# Altium PCB PCB.PcbDoc
Units mm, origin at the board's own origin, x right, y up, seen from the top; angles counter-clockwise.
Board outline 50 x 100 mm, 2 copper layers (Top Layer, Bottom Layer); 42 components, 35 nets, 172 pads, 0 vias.
Unrouted connection lines stored in the file: 92.
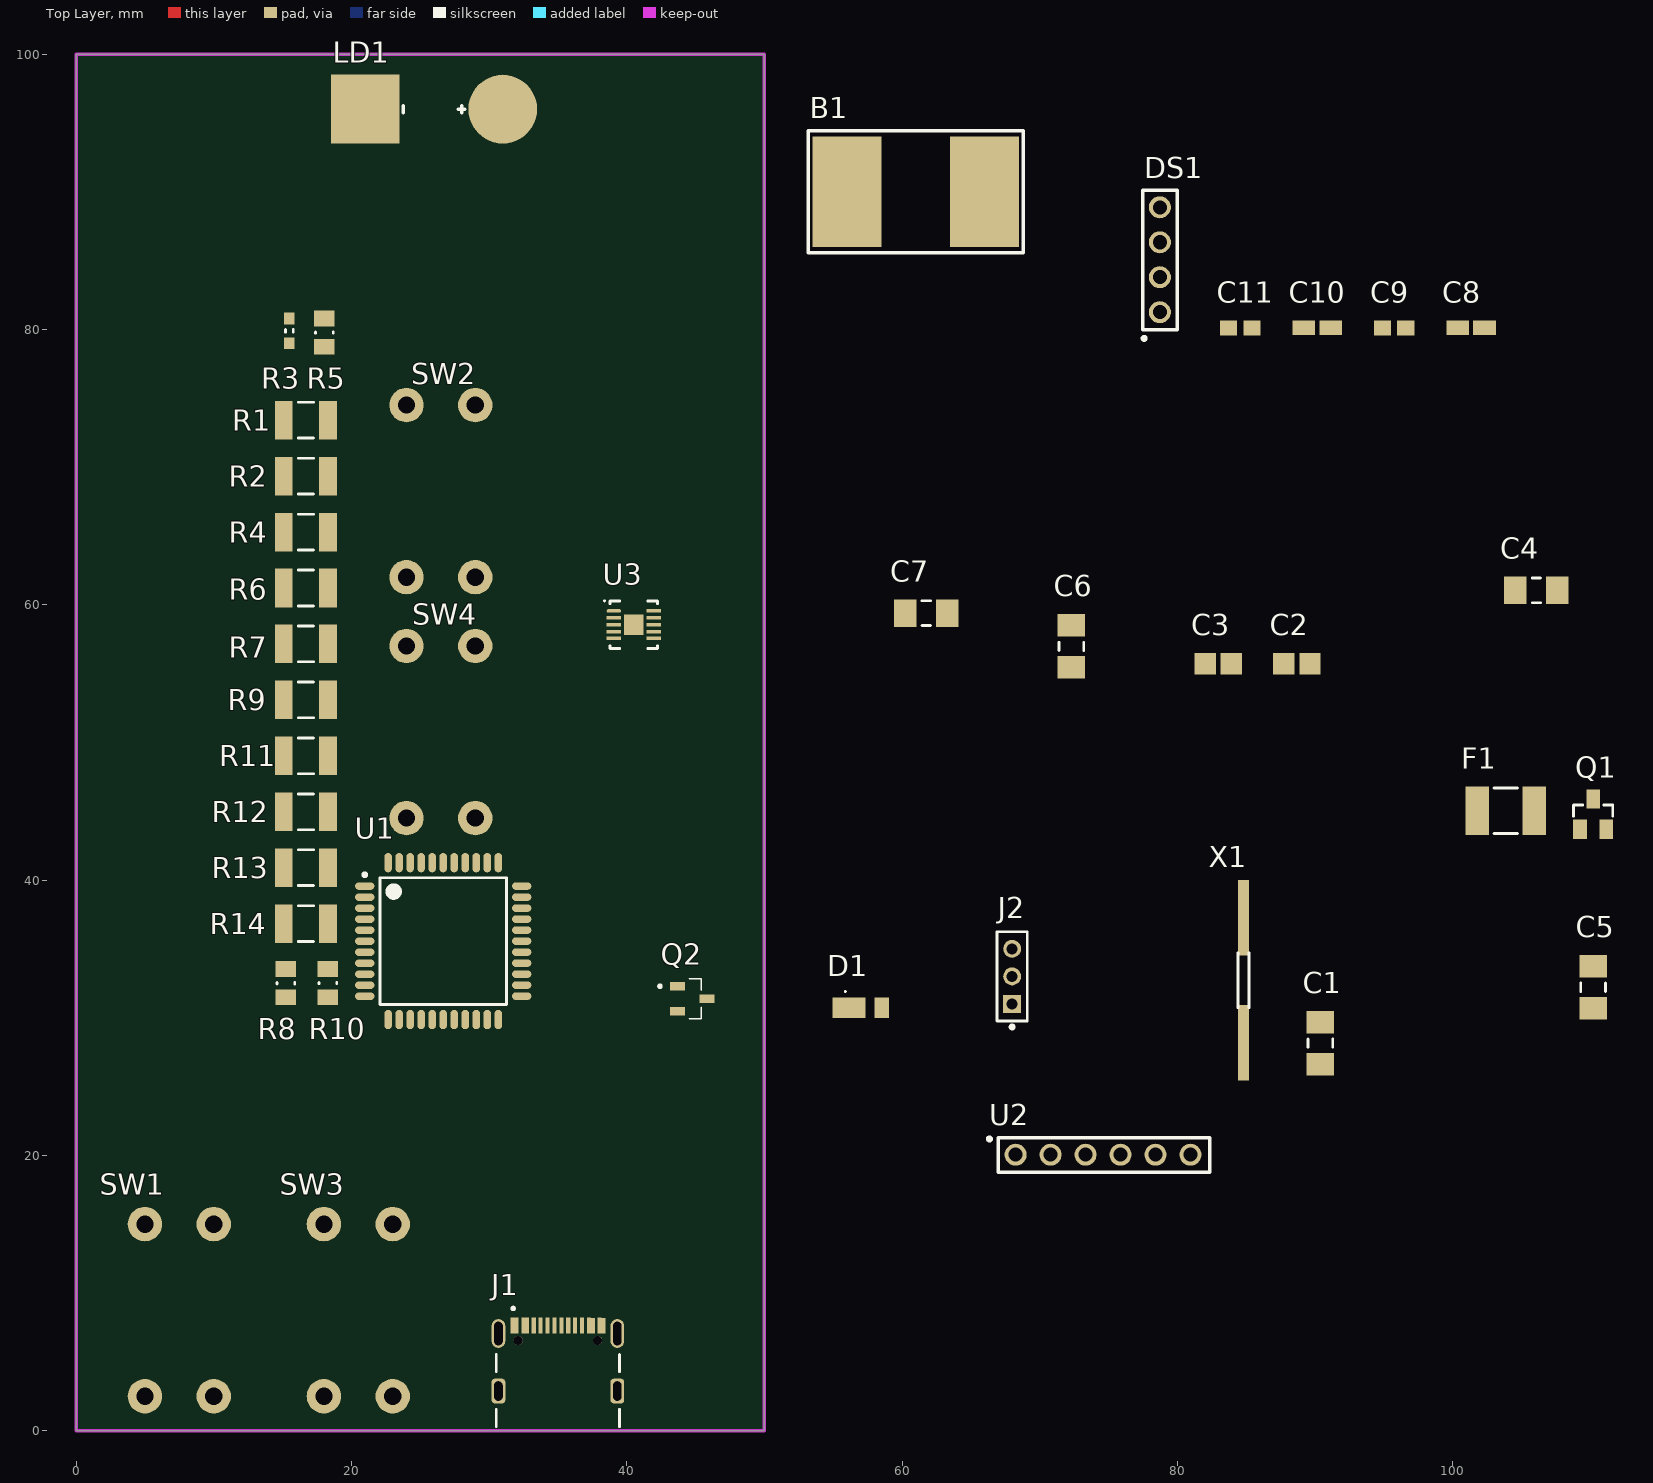
[diagram p0: Top Layer view]
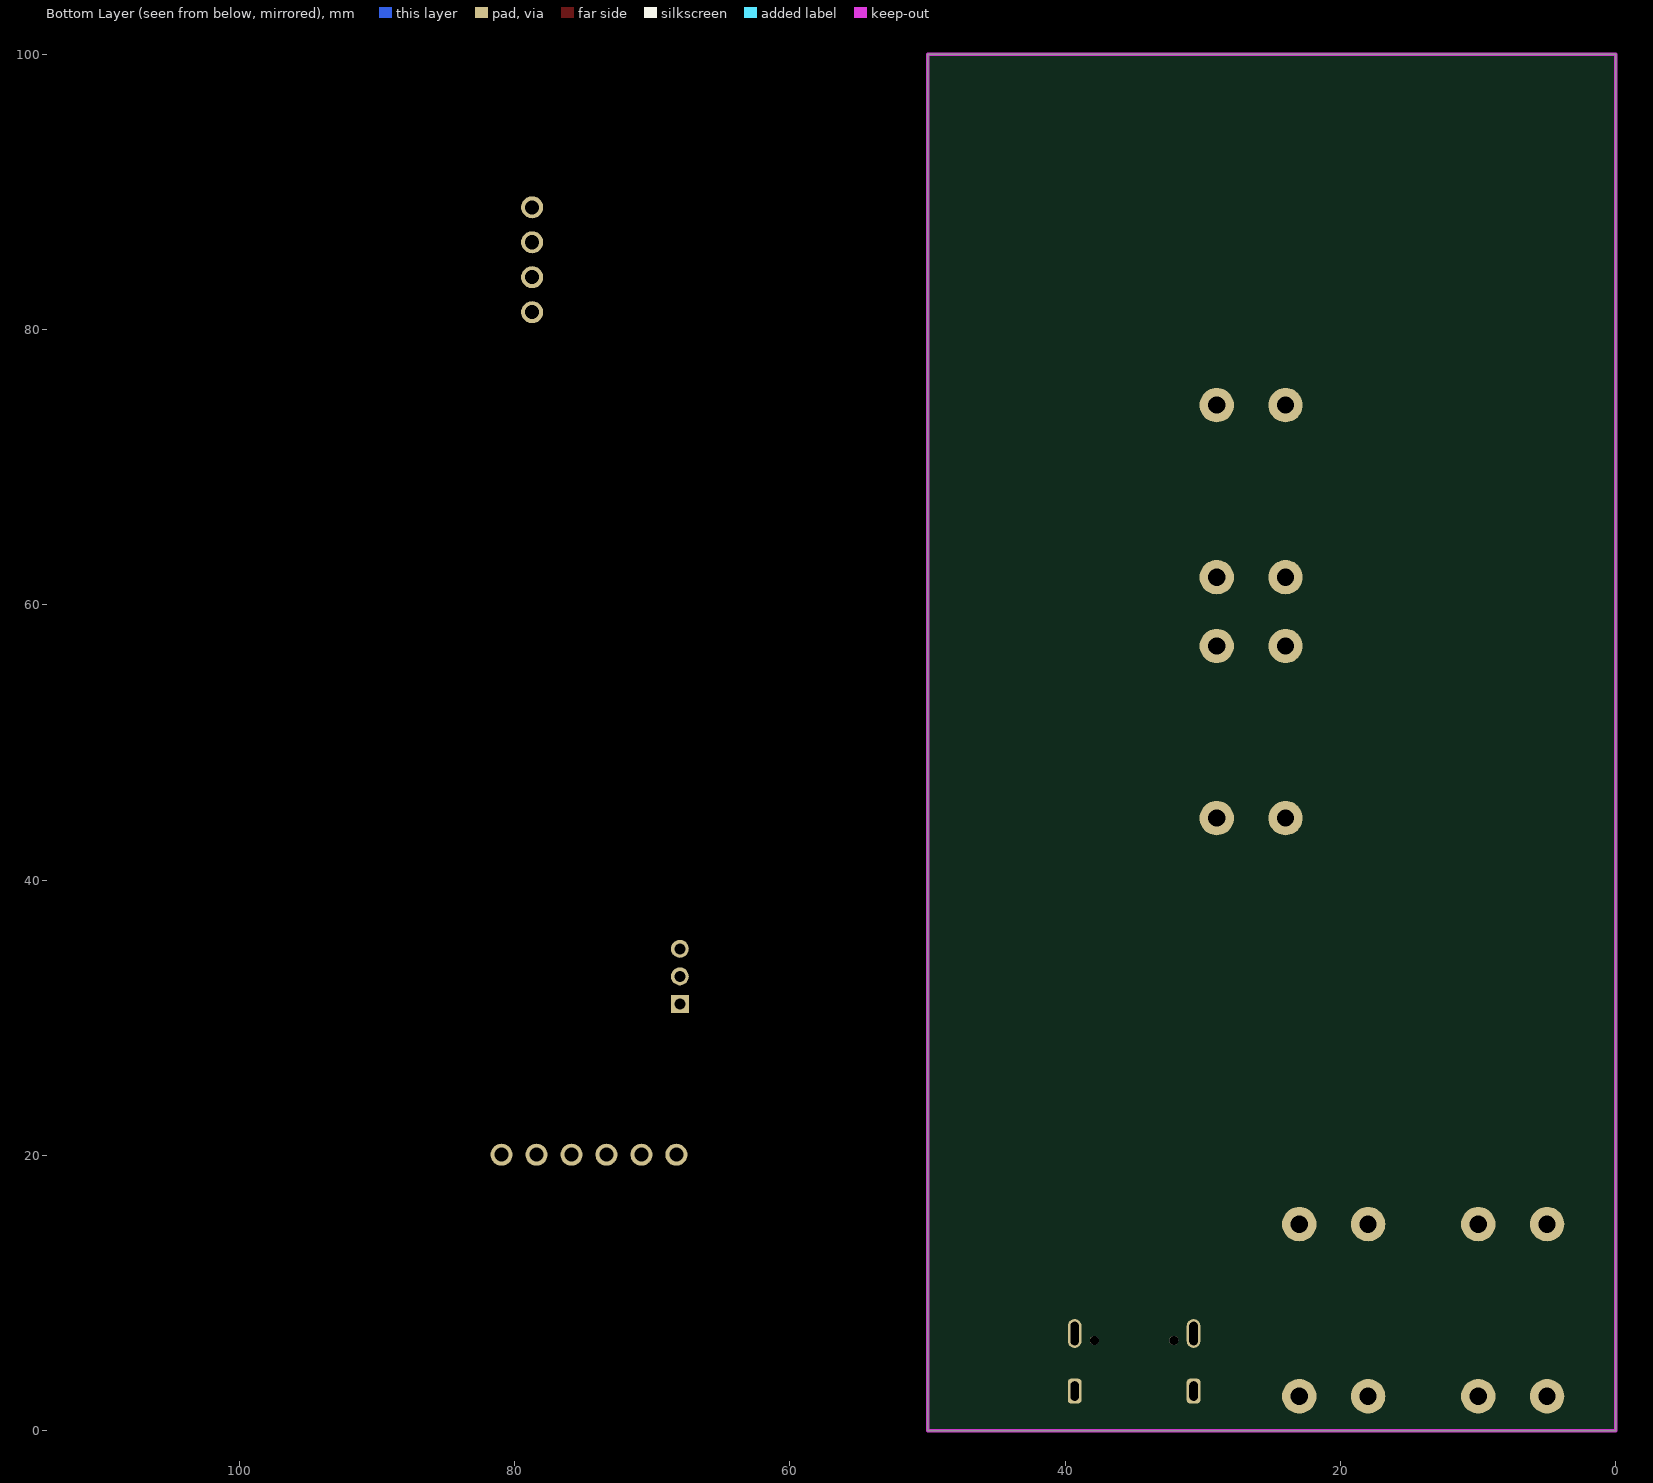
[diagram p1: Bottom Layer view, seen from below]

## Layer stack, top to bottom
Top Solder: solder mask 0.0102, Solder Resist, Dk 3.5
Top Layer: signal copper 0.0356
Dielectric 1: dielectric 0.32, FR-4, Dk 4.8
Bottom Layer: signal copper 0.0356
Bottom Solder: solder mask 0.0102, Solder Resist, Dk 3.5

## Board outline
0,0 0,100 50,100 50,0

## Design rules (kind name [scope] priority, off if disabled: settings)
Clearance [All] p1: gap=0.254 ignorepadtopadclearanceinfootprint=FALSE
PolygonConnect [All] p1: connectstyle=Relief reliefconductorwidth=0.254 reliefentries=4 polygonreliefangle="90 Angle" airgapwidth=0.254
RoutingVias [All] p1: holewidth=0.711 width=1.27 viastyle="Through Hole" minholewidth=0.711 minwidth=1.27 maxholewidth=0.711 maxwidth=1.27
SolderMaskExpansion [All] p1: expansion=0.102 istentingtop=FALSE
SupplyNets "Schematic Supply Nets_2" [InNet('VBATT')] p1: voltage=0.000
SupplyNets "Schematic Supply Nets_1" [InNet('+3V3')] p2: voltage=0.000
SupplyNets "Schematic Supply Nets" [InNet('GND')] p3: voltage=0.000
Width [All] p1: maxlimit=0.254 minlimit=0.254 preferedwidth=0.254
30 further rules are at their usual default settings.

## Classes and differential pairs
component class randcomponenten: B1 C8 C9 C10 C11 D1 DS1 F1 J1 J2 LD1 Q1 Q2 R1 R3 R4 R5 R6 R7 R8 R9 R10 R11 R12 R13 R14 SW1 SW2 SW3 SW4 U2 U3
component class chip: C1 C2 C3 C4 C5 C6 C7 U1 X1

## Components (designator, comment, footprint, x,y, rotation, side; value= is the part's Value field where it differs from the comment)
B1 "2xAA" BATTERIJHOUDER 66,90 r90 top
C1 "0.1µF" CAPC1210X70M 90.399,28.147 r90 top
C2 "12pF" CAPC1210X14M 88.685,55.706 r0 top
C3 "12pF" CAPC1210X14M 82.97,55.706 r0 top
C4 "0.1µF" CAPC1210X70M 106.083,61.04 r0 top
C5 "0.1µF" CAPC1210X70M 110.211,32.21 r270 top
C6 "0.1µF" CAPC1210X70M 72.302,56.977 r90 top
C7 "0.1µF" CAPC1210X70M 61.76,59.389 r0 top
C8 "1µF" CAPC0603X8M 101.338,80.107 r0 top
C9 "10µF" CAPC0603X035M 95.75,80.107 r0 top
C10 "1µF" CAPC0603X8M 90.162,80.107 r0 top
C11 "10µF" CAPC0603X035M 84.574,80.107 r0 top
D1 "DFLS120LQ-7" SDIODSMA1810X1M 57.332,30.714 r0 top
DS1 "LCD" LCD3V3 78.732,85.06 r90 top
F1 "MINIASMDC075F/33-2" RESC4632X15M 103.861,45.038 r0 top
J1 "USBConnector" PCBComponent_1 35,5.252 r0 top
J2 "NRPN031PAEN-RC" FP-NRPN031PAEN-RC-MFG 68,33 r90 top
LD1 "Laser" laser 26,96 r90 top
Q1 "FDN304P" FDN304P 110.211,44.784 r0 top
Q2 "DMN2056U7" DMN2056U-7 44.756,31.37 r0 top
R1 "10kOhm" R1210X06M 16.688,73.406 r0 top
R2 "10k" R1210X06M 16.688,69.342 r0 top
R3 "100kOhm" R0603X045M 15.494,79.894 r90 top
R4 "10kOhm" R1210X06M 16.688,65.278 r0 top
R5 "22Ohm" R0805X045M 18.034,79.765 r270 top
R6 "10kOhm" R1210X06M 16.688,61.214 r0 top
R7 "10kOhm" R1210X06M 16.688,57.15 r0 top
R8 "22Ohm" R0805X045M 15.24,32.503 r270 top
R9 "10kOhm" R1210X06M 16.688,53.086 r0 top
R10 "22Ohm" R0805X045M 18.288,32.512 r270 top
R11 "10kOhm" R1210X06M 16.688,49.022 r0 top
R12 "10kOhm" R1210X06M 16.688,44.958 r0 top
R13 "10kOhm" R1210X06M 16.688,40.894 r0 top
R14 "10kOhm" R1210X06M 16.688,36.83 r0 top
SW1 "Button" BUTTON 1.612,15.594 r270 top
SW2 "Button" BUTTON 32.388,61.406 r90 top
SW3 "Button" BUTTON 26.388,1.906 r90 top
SW4 "Button" BUTTON 32.388,43.906 r90 top
U1 "ATmega32u4" Atmega32u4 26.67,35.56 r0 top
U2 "Sensor" Vl53l1x 74.604,20.046 r0 top
U3 "MCP1256T" MCP1256T 40.513,58.548 r0 top
X1 "XTAL_8MHz" Xtal_HC49SSDLF 84.811,32.719 r90 top

## Footprints (in the part's own frame and the unit in brackets; to place one, negate y for a bottom-side part, rotate by r counter-clockwise, add the part's x,y. Pads: shape width x height; smd on the part's side, far side on the other; paste and mask are expansions set on the pad)
Atmega32u4 [mm] "TQFP, 44-Leads, Body 10.00x10.00mm, Pitch 0.80mm, Thermal Pad 4.60x4.60mm, IPC Medium Density"
  oval 1.4x0.55 smd: 1(-5.7,4) 2(-5.7,3.2) 3(-5.7,2.4) 4(-5.7,1.6) 5(-5.7,0.8) 6(-5.7,0) 7(-5.7,-0.8) 8(-5.7,-1.6) 9(-5.7,-2.4) 10(-5.7,-3.2) 11(-5.7,-4) 23(5.7,-4) 24(5.7,-3.2) 25(5.7,-2.4) 26(5.7,-1.6) 27(5.7,-0.8) 28(5.7,0) 29(5.7,0.8) 30(5.7,1.6) 31(5.7,2.4) 32(5.7,3.2) 33(5.7,4)
  oval 0.55x1.4 smd: 12(-4,-5.7) 13(-3.2,-5.7) 14(-2.4,-5.7) 15(-1.6,-5.7) 16(-0.8,-5.7) 17(0,-5.7) 18(0.8,-5.7) 19(1.6,-5.7) 20(2.4,-5.7) 21(3.2,-5.7) 22(4,-5.7) 34(4,5.7) 35(3.2,5.7) 36(2.4,5.7) 37(1.6,5.7) 38(0.8,5.7) 39(0,5.7) 40(-0.8,5.7) 41(-1.6,5.7) 42(-2.4,5.7) 43(-3.2,5.7) 44(-4,5.7)
  silkscreen extent -5.82,-4.6 4.6,4.95, body extent -5,-5 5,5, height 1
BATTERIJHOUDER [mm]
  rect 8x5 smd: 1(0,0) 2(0,10)
  silkscreen extent -4.45,-2.79 4.44,12.83
BUTTON [mm]
  round 2.5 hole 1.25: 1(0.594,8.388) 2(13.094,8.388) 3(0.594,3.388) 4(13.094,3.388)
  body extent -0.14,-0.16 13.86,11.84, height 7.2
CAPC0603X8M [mm] "Chip Capacitor, 2-Leads, Body 4.50x3.10mm, IPC Low Density"
  rect 1.65x1.05 smd: 1(-0.975,0) 2(0.975,0)
  body extent -1.2,-0.4 1.2,0.4, height 0.8
CAPC0603X035M [mm] "Chip Capacitor, 2-Leads, Body 1.60x0.81mm, IPC Low Density"
  rect 1.25x1.1 smd: 1(-0.85,0) 2(0.85,0)
  body extent -0.87,-0.48 0.87,0.48, height 0.35
CAPC1210X14M [mm] "Chip Capacitor, 2-Leads, Body 2.10x1.25mm, IPC Low Density"
  rect 1.55x1.55 smd: 1(-0.95,0) 2(0.95,0)
  body extent -1.15,-0.72 1.15,0.72, height 1.15
CAPC1210X70M [mm] "Chip Resistor, 2-Leads, Body 3.30x1.70mm, IPC Low Density"
  rect 1.65x2 smd: 1(-1.525,0) 2(1.525,0)
  silkscreen extent -0.3,-0.9 0.3,0.9, body extent -1.8,-0.95 1.8,0.95, height 0.8
DMN2056U-7 [mm] "N-Mosfet"
  rect 1.09x0.61 smd paste+0 mask+0.102: D2(1.07,0) G1(-1.07,0.915) S3(-1.07,-0.915)
  silkscreen extent -2.44,-1.45 0.65,1.45, body extent -1.33,-1.45 1.07,1.45, height 1.14
FDN304P [mm] "P-Mosfet"
  rect 1x1.4 smd: D2(0,1.1) G1(-0.95,-1.1) S3(0.95,-1.1)
  silkscreen extent -1.42,-0.15 1.42,0.66, body extent -1.46,-1.38 1.46,1.13, height 1.12
FP-NRPN031PAEN-RC-MFG [mm]
  rect 1.3x1.3 hole 0.8 paste-2539.97 mask+0: 1(-2,0)
  round 1.3 hole 0.8 paste-2539.97 mask+0: 2(0,0) 3(2,0)
  silkscreen extent -3.8,-1.1 3.25,1.1, body extent -3.35,-1.2 3.35,1.2, height 0.25
laser [mm]
  round 5 smd: 1(0,-5)
  rect 5x5 smd: 2(0,5)
  silkscreen extent -0.25,-2.25 0.25,2.25
LCD3V3 [mm] "Pinheader 4pin 90° vr LCD"
  round 1.6 hole 1.02: 1(-3.81,0) 2(-1.27,0) 3(1.27,0) 4(3.81,0)
  silkscreen extent -5.84,-1.27 5.04,1.27
MCP1256T [mm] "SON, 10-Leads, Body 3.00x3.00mm, Pitch 0.50mm, Thermal Pad 1.50x1.44mm, IPC Low Density"
  oval 1.05x0.25 smd: 1(-1.445,1)
  rect 1.05x0.25 smd: 2(-1.445,0.5) 3(-1.445,0) 4(-1.445,-0.5) 5(-1.445,-1) 6(1.445,-1) 7(1.445,-0.5) 8(1.445,0) 9(1.445,0.5) 10(1.445,1)
  rect 1.44x1.5 smd: 11(0,0)
  silkscreen extent -2.17,-1.73 1.72,1.77, body extent -1.58,-1.58 1.57,1.58, height 1
PCBComponent_1 [mm]
  rect 0.3x1.15 smd: A1(-3.275,2.375) A4(-2.504,2.375) A5(-1.25,2.378) A6(-0.25,2.378) A7(0.25,2.378) A8(1.25,2.378) A9(2.54,2.372) A12(3.302,2.372) B1(3.025,2.375) B5(1.75,2.378) B6(0.75,2.378) B7(-0.75,2.378) B8(-1.75,2.378) B9(-2.25,2.375) B12(-3,2.375)
  rect 0.305x1.15 smd: B4(2.25,2.375)
  rrect50% 1x1.8 hole 0.6 slot 1.4 at 90 deg: SH1(-4.32,-2.377) SH1(4.32,-2.377)
  oval 1x2.1 hole 0.6 slot 1.7 at 90 deg: SH1(-4.32,1.803) SH1(4.32,1.803)
  round 0.65 hole 0.65 unplated: ""(-2.89,1.303) ""(2.89,1.303)
  silkscreen extent -4.47,-4.98 4.47,3.72, body extent -3.96,-5.1 4.98,2.61, height 3.31
R0603X045M [mm] "Chip Resistor, 2-Leads, Body 2.00x0.60mm, IPC Low Density"
  rect 0.85x0.75 smd: 1(-0.9,0) 2(0.9,0)
  silkscreen extent -0.1,-0.28 0.1,0.28, body extent -1,-0.3 1,0.3, height 0.45
R0805X045M [mm] "Chip Resistor, 2-Leads, Body 2.00x1.25mm, IPC Low Density"
  rect 1.15x1.5 smd: 1(-1.025,0) 2(1.025,0)
  silkscreen extent -0.05,-0.65 0.05,0.65, body extent -1.05,-0.7 1.05,0.7, height 0.55
R1210X06M [mm] "Chip Resistor, 2-Leads, Body 3.20x2.50mm, IPC Low Density"
  rect 1.3x2.8 smd: 1(-1.6,0) 2(1.6,0)
  silkscreen extent -0.55,-1.3 0.55,1.3, body extent -1.7,-1.35 1.7,1.35, height 0.7
RESC4632X15M [mm] "Chip Resistor, 2-Leads, Body 4.55x3.24mm, IPC Low Density"
  rect 1.7x3.5 smd: 1(-2.075,0) 2(2.075,0)
  silkscreen extent -0.85,-1.65 0.85,1.65, body extent -2.36,-1.71 2.36,1.7, height 1.46
SDIODSMA1810X1M [mm] "Chip Diode, 2-Leads, Body 3.60x1.71mm, IPC Low Density"
  rect 2.4x1.5 smd: 1(-1.187,0)
  rect 1.05x1.5 smd: 2(1.188,0)
  silkscreen extent -1.5,1.14 -1.4,1.24, body extent -2.17,-0.89 1.53,0.89, height 0.98
Vl53l1x [mm] "Sensor pinheader"
  round 1.6 hole 1.02: 1(-6.35,0) 2(-3.81,0) 3(-1.27,0) 4(1.27,0) 5(3.81,0) 6(6.35,0)
  silkscreen extent -8.38,-1.27 7.75,1.27
Xtal_HC49SSDLF [mm] "8MHz"
  rect 5.5x0.8 smd: 1(-4.55,0) 2(4.55,0)
  silkscreen extent -2,-0.4 2,0.4, body extent -6.75,-2.5 6.75,2.5, height 2

## Part data
B1: "Batterijhouder"
C1 C4 C5 C6 C7: library part Condensator0.1µF
C2 C3: library part Condensator12pF
C8 C10: library part 885012206126, "Condensator1µF"
C9 C11: library part "Condensator 10µF"
D1: "Schottky Diode"
F1: "Fuse"
J2: library part CMP-25680-000021-1, "CONN HEADER VERT 3POS 2MM", Current Rating=2A, Manufacturer=Sullins, Package=0, Temperature="-40°C to +105°C", Temperature Range High=+105°C, Temperature Range Low=-40°C, Voltage Rating=150V, Automotive=No, Category=Conn, ComponentLink2Description=Datasheet, ComponentLink2URL=https://drawings-pdf.s3.amazonaws.com/10531.pdf, Conn Gender=Male, Conn Orientation=Straight, Contact Material=Gold,Nickel, Device Class L1=Connectors, Device Class L2="Headers and Wire Housings", Device Class L3=unset, Digikey Description="CONN HEADER VERT 3POS 2MM", Height=6mm, Lead Free=Yes, Manufacturer Part Number=NRPN031PAEN-RC, Number Of Contacts=3, Number Of Rows=1, Octopart=https://octopart.com/nrpn031paen-rc-sullins-12817732, Pitch=2mm, RoHS=TRUE
Q1: "p-mosfet"
Q2: "n-mosfet"
R1 R2 R4 R6 R7 R9 R11 R12 R13 R14: library part Resistor10kOhm
R3: library part Resistor100kOhm
R5 R8 R10: library part Resistor22Ohm
U3: "Switching Voltage Regulator"

## Nets (pads, with @x,y where several pads share a name; then routed paths per layer and width w, separated by ;. In a path a pad name is that pad's centre, name@x,y a point inside that pad or via, vN(x,y) a via of type N, cw(c..) or ccw(c..) an arc to the next point about the centre after c; other vN are vias at no path point)
+3V3: C7.1 C9.2 DS1.3 J2.2 LD1.1 R2.2 R4.2 U1.44 U2.1 U3.5
GND: B1.2 C1.2 C3.1 C4.2 C5.2 C6.2 C7.2 C9.1 C11.1 DS1.4 J1.A12 J1.B1 J1.SH1 Q2.G1 Q2.S3 R3.2 R6.1 R7.2 R9.1 R11.1 R12.1 SW1.1 SW2.3 SW3.1 SW4.1 U1.5 U1.15 U1.23 U1.35 U1.43 U2.2 U3.9
NetB1_1: B1.1 F1.1
NetC1_1: C1.1 U1.42
NetC2_1: C2.1 C3.2 U1.16 X1.2
NetC2_2: C2.2 U1.17 X1.1
NetC4_1: C4.1 U1.14
NetC5_1: C5.1 U1.34
NetC6_1: C6.1 U1.6 U1.24
NetC8_1: C8.1 U3.6
NetC8_2: C8.2 U3.3
NetC10_1: C10.1 U3.4
NetC10_2: C10.2 U3.8
NetD1_1: D1.1 J1.A4 J1.A9 J1.B4 J1.B9
NetD1_2: D1.2 J2.3
NetDS1_1: DS1.1 U1.18 U2.3
NetDS1_2: DS1.2 U1.19 U2.4
NetF1_2: F1.2 Q1.S3
NetJ1_A5: J1.A5 R6.2 R9.2
NetJ1_A6: J1.A6 J1.B6 R10.1
NetJ1_A7: J1.A7 J1.B7 R8.1
NetLD1_2: LD1.2 R5.2
NetQ1_G1: Q1.G1 R3.1
NetQ2_D2: Q2.D2 R5.1
NetR2_1: R2.1 U3.1
NetR4_1: R4.1 SW2.2 U1.32
NetR7_1: R7.1 U1.25
NetR8_2: R8.2 U1.3
NetR10_2: R10.2 R11.2 R12.2 U1.4
NetR14_1: R14.1 SW3.4 U1.13
NetSW1_4: SW1.4 U1.33
NetSW4_4: SW4.4 U1.1
NetU1_20: U1.20 U2.5
NetU1_21: U1.21 U2.6
VBATT: C11.2 J2.1 Q1.D2 U3.7 U3.10
pads on no net: J1. J1.A1 J1.A8 J1.B5 J1.B8 J1.B12 R1.1 R1.2 R13.1 R13.2 R14.2 SW1.2 SW1.3 SW2.1 SW2.4 SW3.2 SW3.3 SW4.2 SW4.3 U1.2 U1.7 U1.8 U1.9 U1.10 U1.11 U1.12 U1.22 U1.26 U1.27 U1.28 U1.29 U1.30 U1.31 U1.36 U1.37 U1.38 U1.39 U1.40 U1.41 U3.2 U3.11

## Keep-outs
Keep-Out Layer:
  lines w0.254: 0,0 50,0 50,100 0,100 ; 0,0 0,100 ; 0,0 0,100

## Text inside footprints (layer, text, board x,y; h text height)
J1: Mechanical 13 "PCB EDGE" at 40.4,0.375 h0.41